# Altium PCB CrashDAQ For Hammond 1554H.PcbDoc (part 1 of 2)
Units mil, origin at the board's own origin, x right, y up, seen from the top; angles counter-clockwise.
Board outline 6580.35 x 4200 mil, 2 copper layers (Top Layer, Bottom Layer); 109 components, 89 nets, 487 pads, 126 vias.
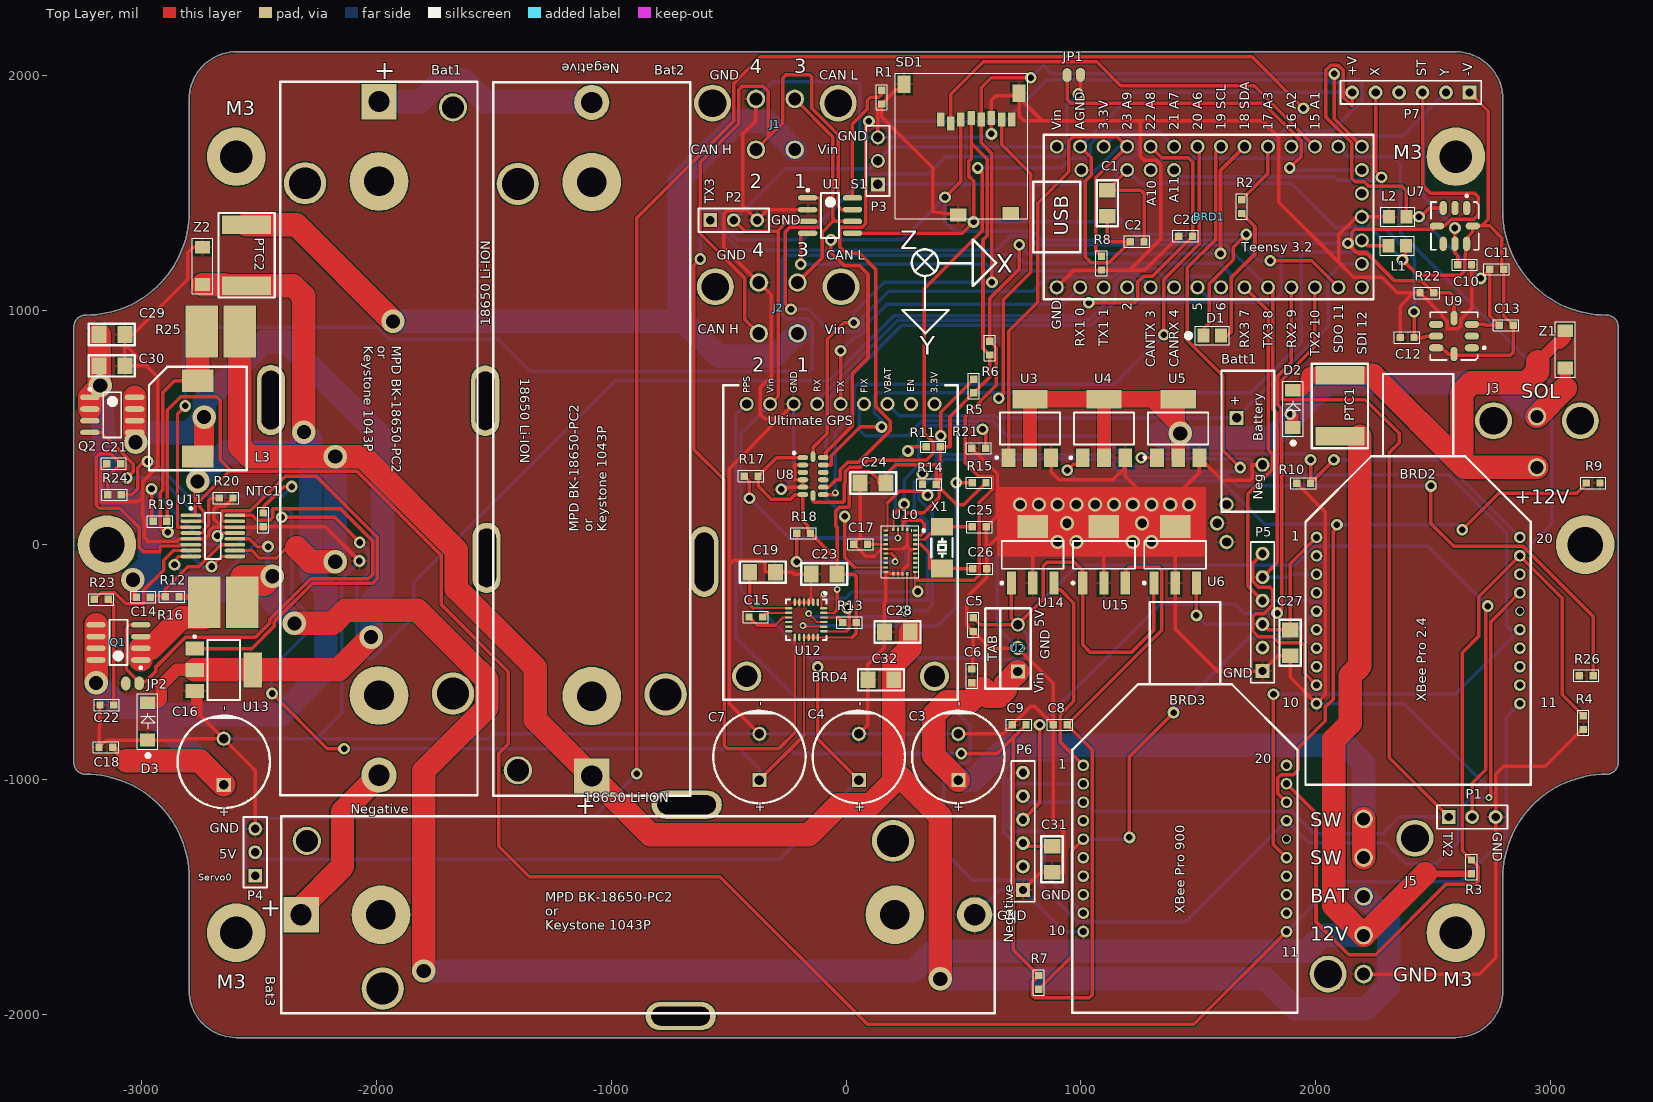
[diagram p0: Top Layer view]
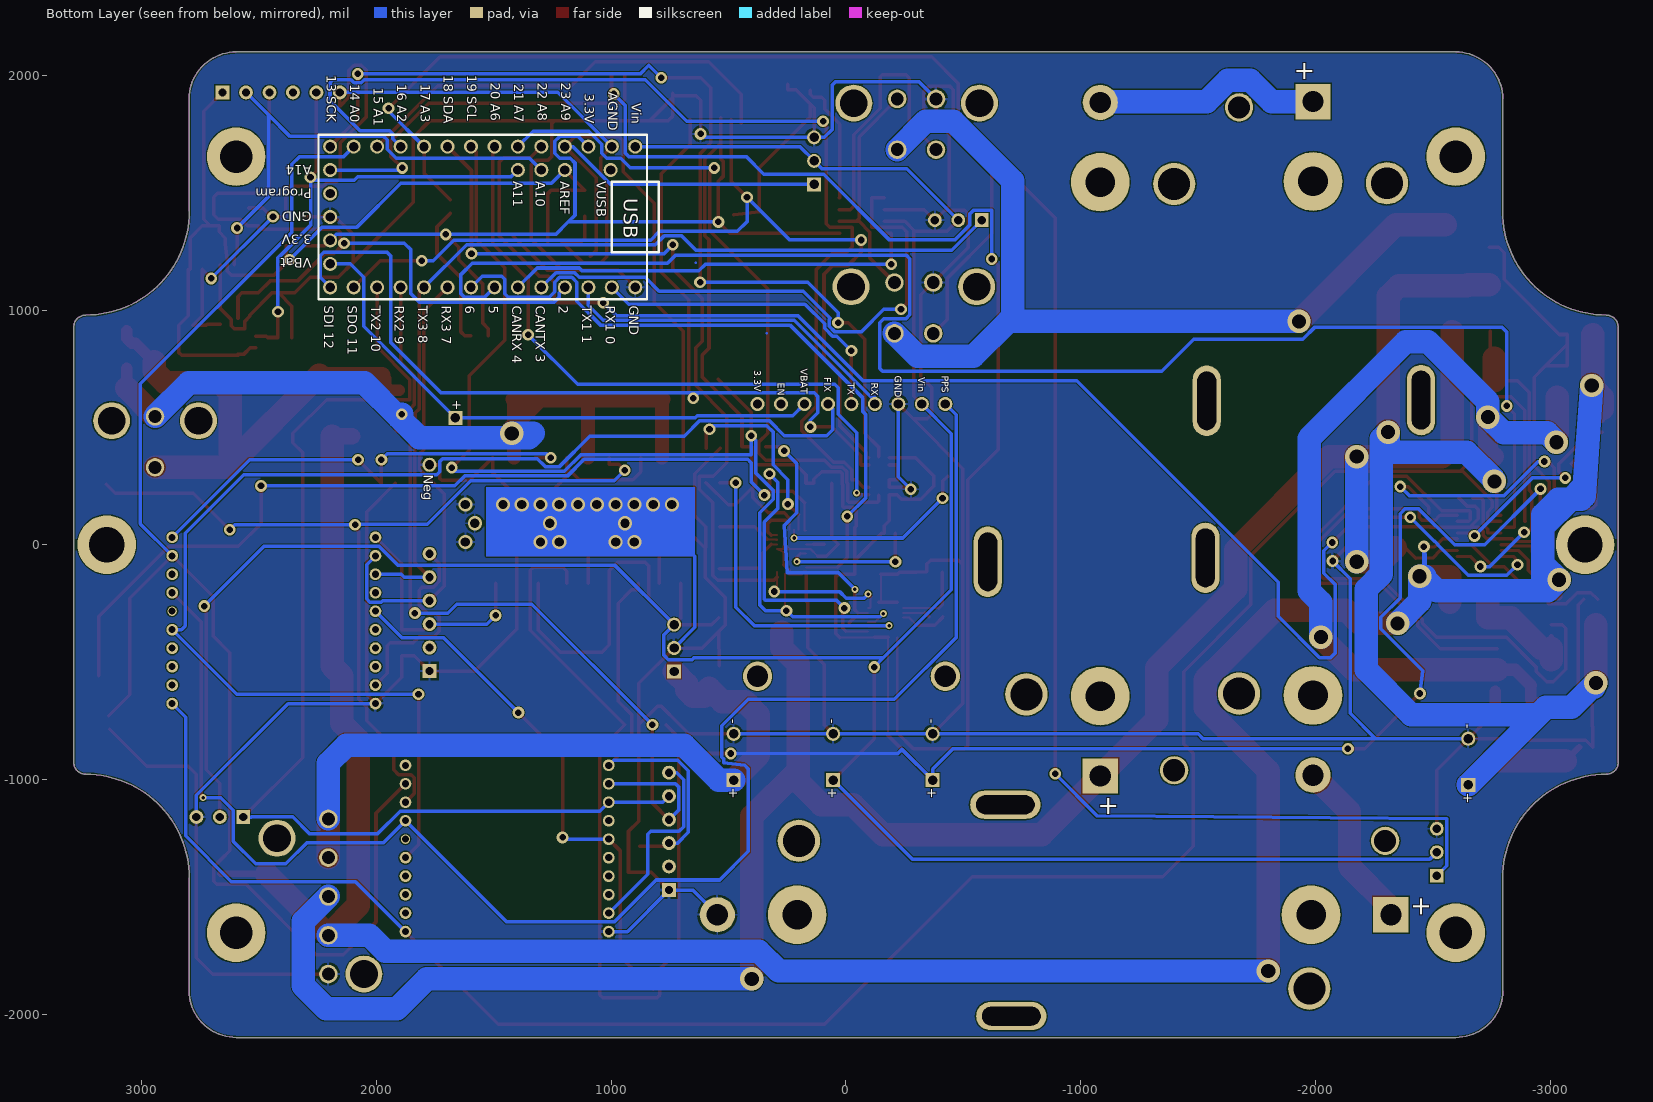
[diagram p1: Bottom Layer view, seen from below]

## Layer stack, top to bottom
Top Solder: solder mask 0.4, Solder Resist, Dk 3.5
Top Layer: signal copper 1.4
Dielectric 1: dielectric 12.6, FR-4, Dk 4.8
Bottom Layer: signal copper 1.4
Bottom Solder: solder mask 0.4, Solder Resist, Dk 3.5

## Board outline
-3240.35,-978.31 cw(c-3240.35,-928.31) -3290.35,-928.31 -3290,-928.31 -3290,928.31 cw(c-3240,928.31) -3240,978.31 ccw(c-3240,1420) -2798.31,1420 -2798.31,1900 -2798.43,1900 cw(c-2598.43,1900) -2598.43,2100 2598.43,2100 cw(c2598.43,1900) 2798.43,1900 2798.31,1900 2798.31,1420 ccw(c3240,1420) 3240,978.31 cw(c3240,928.31) 3290,928.31 3290,-928.31 cw(c3240,-928.31) 3240,-978.31 ccw(c3240,-1420) 2798.31,-1420 2798.31,-1900 2798.43,-1900 cw(c2598.43,-1900) 2598.43,-2100 -2598.78,-2100 cw(c-2598.78,-1900) -2798.78,-1900 -2798.66,-1900 -2798.66,-1420 ccw(c-3240.35,-1420)

## Design rules (kind name [scope] priority, off if disabled: settings)
Clearance [All] p1: gap=5
HoleSize [All] p1: absolutevalues=TRUE maxlimit=250 minlimit=1 maxpercent=80.000 minpercent=20.000
PolygonConnect [All] p1: connectstyle=Relief reliefconductorwidth=10 reliefentries=4 polygonreliefangle="90 Angle" airgapwidth=10
RoomDefinition TeensyCrashDAQ [InComponentClass('TeensyCrashDAQ')] p1: confinementstyle=ConfineIn formatcopy=TRUE lockcomponents=FALSE outline -4418.43,-3668.54 -2418.43,-3668.54 -2418.43,-2668.54 -4418.43,-2668.54
RoomDefinition CrashDAQSensors [InComponentClass('CrashDAQSensors')] p2: confinementstyle=ConfineIn formatcopy=TRUE lockcomponents=FALSE outline -4418.43,-3668.54 -2418.43,-3668.54 -2418.43,-2668.54 -4418.43,-2668.54
RoutingVias RoutingVias_1 [InNet('12V0')  OR InNet('12V0A')   or InNet('12V0B')      or InNet('12V0C') or InNet('12VSWITCHED')    or InNet('BAT') or InNet('BAT2')     or InNet('BAT3') or InNet('SOLENOID') or InNet('RAWIN') or InNet('RAW')] p1: holewidth=60 width=100 viastyle="Through Hole" minholewidth=30 minwidth=50 maxholewidth=120 maxwidth=150
RoutingVias [All] p2: holewidth=28 width=50 viastyle="Through Hole" minholewidth=28 minwidth=50 maxholewidth=28 maxwidth=50
SMDNeckDown [All] p1: percent=90.000
SilkToSilkClearance [All] p1: silktosilkclearance=1
SolderMaskExpansion [All] p1: expansion=4
Width 12V [InNet('12V0')  OR InNet('12V0A')   or InNet('12V0B')      or InNet('12V0C') or InNet('12VSWITCHED')    or InNet('BAT') or InNet('BAT2')     or InNet('BAT3') or InNet('SOLENOID') or InNet('RAWIN') or InNet('RAW')] p1: maxlimit=150 minlimit=10 preferedwidth=100
Width [All] p2: maxlimit=50 minlimit=7 preferedwidth=15
28 further rules are at their usual default settings.

## Classes and differential pairs
component class CrashDAQSensors: Bat1 Bat2 Bat3 BRD4 C10 C11 C12 C13 C14 C15 C16 C17 C18 C19 C20 C21 C22 C23 C24 C25 C26 C28 C29 C30 C32 D3 JP1 JP2 L3 NTC1 P7 PTC2 Q1 Q2 R11 R12 R13 R14 R15 R16 R17 R18 R19 R20 R21 R22 R23 R24 R25 R26 U7 U8 U9 U10 U11 U12 U13 X1 Z2
component class TeensyCrashDAQ: Batt1 BRD1 BRD2 BRD3 C1 C2 C3 C4 C5 C6 C7 C8 C9 C27 C31 D1 D2 J1 J2 J3 J5 L1 L2 P1 P2 P3 P4 P5 P6 PTC1 R1 R2 R3 R4 R5 R6 R7 R8 R9 R10 SD1 U1 U2 U3 U4 U5 U6 U14 U15 Z1

## Components (designator, comment, footprint, x,y, rotation, side; value= is the part's Value field where it differs from the comment)
Bat1 "18650" "18650 HOLDER" -1083.66,449.8 r90 top
Bat2 "18650" "18650 HOLDER" -1990.16,452.76 r270 top
Bat3 "18650" "18650 HOLDER" -886.81,-1576.77 r0 top
Batt1 "CR1225FV-LF" "Coin Cell with Tabs" 1774.61,340.55 r90 top
BRD1 "Teensy 3.2" Teensy 2197.83,1096.46 r90 top
BRD2 "Xbee 2.4 GHz" Xbee 2004.92,31.5 r0 top
BRD3 "Xbee 900 MHz" Xbee 1010.83,-939.96 r0 top
BRD4 "Adafruit Ultimate GPS" GPS 376.7,679.28 r90 top
C1 "4.7uF" 1206 1113.19,1454.72 r90 top
C2 "0.1uF" 0603 1240.16,1291.34 r0 top
C3 "330uF" "Elec. Cap 5 x 10mm" 478.35,-1002.95 r90 top
C4 "330uF" "Elec. Cap 5 x 10mm" 54.63,-1002.95 r90 top
C5 "0.1uF" 0603 542.32,-340.55 r90 top
C6 "0.1uF" 0603 536.42,-559.06 r270 top
C7 "330uF" "Elec. Cap 5 x 10mm" -369.09,-1002.95 r90 top
C8 "1.0uF" 0603 912.4,-767.72 r0 top
C9 "8.2pF" 0603 737.2,-767.72 r0 top
C10 "1000pF" 0603 2635.83,1192.91 r180 top
C11 "0.1uF" 0603 2772.64,1173.23 r0 top
C12 "1000pF" 0603 2390.75,882.87 r0 top
C13 "0.1uF" 0603 2812.99,935.04 r0 top
C14 "15nF" 0603 -2994.09,-223.43 r0 top
C15 "0.22uF" 0603 -383.86,-308.07 r0 top
C16 "330uF" "Elec. Cap 5 x 10mm" -2651.57,-1023.62 r90 top
C17 "1.0uF" 0603 62.01,1.97 r0 top
C18 "0.1uF" 0603 -3153.54,-863.19 r0 top
C19 "4.7uF" 1206 -355.31,-117.13 r0 top
C20 "4700pF" 0603 1446.85,1314.96 r0 top
C21 "0.47uF" 0603 -3120.08,345.47 r0 top
C22 "0.1uF" 0603 -3149.61,-683.07 r0 top
C23 "4.7uF" 1206 -93.5,-125 r0 top
C24 "4.7uF" 1206 115.16,262.8 r0 top
C25 "12 pF" 0603 567.91,75.79 r180 top
C26 "12 pF" 0603 569.88,-102.36 r180 top
C27 "10uF" 1206 1892.72,-418.31 r90 top
C28 "10uF" 1206 218.5,-372.05 r0 top
C29 "10uF" 1206 -3127.95,895.67 r180 top
C30 "10uF" 1206 -3127.95,761.81 r180 top
C31 "10uF" 1206 877.95,-1340.55 r90 top
C32 "10uF" 1206 148.62,-575.79 r0 top
D1 "Red" "0805 Polarized" 1559.06,890.75 r0 top
D2 "B360A-13-F" "SMA with A and K" 1903.54,499.02 r90 top
D3 "B360A-13-F" "SMA with A and K" -2976.38,-832.68 r90 top
J1 "39-29-9040" "4 POS Vertical MINI-FIT JR" -301.18,1899.61 r0 top
J2 "39-29-9040" "4 POS Vertical MINI-FIT JR" -289.37,1117.13 r0 top
J3 "39-29-9023" "2 POS Vertical MINI-FIT JR" 2861.22,546.26 r0 top
J5 "Molex 39-30-2050" "5 POS Vert MINI-FIT JR" 2205.71,-1829.72 r90 top
JP1 "Solder Jumper" "Solder Jumper" 980.32,2000 r0 top
JP2 "Solder Jumper" "Solder Jumper" -3050.2,-589.57 r180 top
L1 "80 Ohms" 0805 2350.39,1273.62 r180 top
L2 "80 Ohms" 0805 2348.43,1397.64 r0 top
L3 "8.2 uH" "Inductor - 1045" -2970.47,316.93 r0 top
NTC1 "10k" 0603 -2483.27,105.32 r90 top
P1 "Header 3" HDR1X3#1 2567.91,-1160.43 r0 top
P2 "Header 3" HDR1X3#1 -578.74,1382.87 r0 top
P3 "Header 3" HDR1X3#2 135.83,1535.43 r90 top
P4 "Header 3" HDR1X3#1 -2517.72,-1410.43 r90 top
P5 "Header 6" HDR1X6 1774.61,-538.39 r90 top
P6 "Header 6" HDR1X6 753.94,-1471.46 r90 top
P7 "Header 6" HDR1X6 2656.5,1927.17 r180 top
PTC1 "750mA" 2920 2104.33,591.54 r90 top
PTC2 "750mA" 2920 -2554.13,1233.27 r270 top
Q1 "IRF9328" SOIC-8 -3100.39,-416.34 r180 top
Q2 "IRF9328" SOIC-8 -3126.97,553.15 r0 top
R1 "4.7k" 0603 152.56,1907.48 r90 top
R2 "470" 0603 1686.02,1440.94 r90 top
R3 "180k" 0603 2665.35,-1373.03 r90 top
R4 "32.4k" 0603 3141.73,-757.87 r90 top
R5 "4.7k" 0603 544.29,676.18 r270 top
R6 "4.7k" 0603 612.2,837.6 r270 top
R7 "4.7k" 0603 820.87,-1865.16 r90 top
R8 "32.4k" 0603 1088.58,1199.8 r90 top
R9 "32.4k" 0603 3183.07,262.8 r180 top
R10 "32.4k" 0603 1949.8,261.81 r0 top
R11 "10k" 0603 372.05,417.32 r0 top
R12 "4.7k" 0603 -2872.05,-222.44 r0 top
R13 "10k" 0603 14.76,-331.69 r0 top
R14 "10k" 0603 355.32,256.89 r0 top
R15 "10k" 0603 566.93,263.78 r0 top
R16 "0.04" 2818 -2654.53,-246.06 r0 top
R17 "10k" 0603 -404.53,292.32 r0 top
R18 "10k" 0603 -181.1,48.23 r0 top
R19 "32.4k" 0603 -2923.23,99.41 r180 top
R20 "309k" 0603 -2641.73,198.82 r0 top
R21 "4.7k" 0603 565.94,410.43 r0 top
R22 "4.7k" 0603 2475.39,1072.83 r0 top
R23 "6.04k" 0603 -3173.23,-233.27 r0 top
R24 "32.4k" 0603 -3117.13,212.6 r0 top
R25 "0.025" 2818 -2664.37,908.46 r0 top
R26 "4.7k" 0603 3154.53,-558.07 r0 top
SD1 "microSD" "SD Card Holder" 219.49,1389.76 r0 top
U1 "MCP2562" SOIC-8 -67.91,1402.56 r0 top
U2 "OKI-78SR" 78xx 732.28,-540.35 r90 top
U3 "NCV8403ASTT1G" ONSC-SOT-223-4-318E-04_V 783.46,495.08 r90 top
U4 "NCV8403ASTT1G" ONSC-SOT-223-4-318E-04_V 1099.41,495.08 r90 top
U5 "NCV8403ASTT1G" ONSC-SOT-223-4-318E-04_V 1415.35,495.08 r90 top
U6 "MCP1825ST-3302E/DB" SOT-223-DB3_M 1402.56,-43.31 r90 top
U7 "ADXL001-250" ADI-E-8-1_V 2594.49,1358.27 r270 top
U8 "ADXL375" ADI-CC-14-1_V -140.75,292.32 r0 top
U9 "ADXL001-250" ADI-E-8-1_V 2590.55,888.78 r180 top
U10 "BNO055" "BNO055 LGA" 232.28,-29.53 r270 top
U11 "LTC4006EGN-2" LT-GN-16_N -2697.83,37.4 r0 top
U12 "LSM9DS0 IMU" "LGA 4x4x1 mm 24-lead" -169.29,-319.88 r0 top
U13 "NCV8403ASTT1G" ONSC-SOT-223-4-318E-04_V -2651.57,-533.46 r0 top
U14 "MCP1825ST-3302E/DB" SOT-223-DB3_M 795.28,-43.31 r90 top
U15 "MCP1825ST-3302E/DB" SOT-223-DB3_M 1098.92,-43.31 r90 top
X1 "32.768KHz" "XTAL 2 pad" 408.46,-101.38 r90 top
Z1 "SMA6J" SMA 3064.96,911.42 r270 top
Z2 "SMA6J" SMA -2742.13,1108.27 r90 top

## Footprints (in the part's own frame and the unit in brackets; to place one, negate y for a bottom-side part, rotate by r counter-clockwise, add the part's x,y. Pads: shape width x height; smd on the part's side, far side on the other; paste and mask are expansions set on the pad)
"2 POS Vertical MINI-FIT JR" [mm] "Vertical Header 39-29-9023"
  round 4 hole 3: 0(-2.6,-0.46) 0(6.8,-0.46)
  round 2 hole 1.4: 1(2.1,-5.5) 2(2.1,0)
"4 POS Vertical MINI-FIT JR" [mm] "Vertical Header"
  round 4 hole 3: 0(-6.8,-0.46) 0(6.8,-0.46)
  round 2 hole 1.4: 1(2.1,-5.5) 2(-2.1,-5.5) 3(2.1,0) 4(-2.1,0)
"5 POS Vert MINI-FIT JR" [mm] "Molex 5 Pos Vertical Header with Pegs 39-30-2050"
  round 4 hole 3: 0(0,3.85) 0(14.7,-5.55)
  round 2 hole 1.4: 1(16.8,0) 2(12.6,0) 3(8.4,0) 4(4.2,0) 5(0,0)
78xx [mil] "Voltage regulator based on LM7805"
  rect 60x60 hole 40: 1(0,0)
  round 60 hole 40: 2(100,0) 3(200,0)
  silkscreen extent -73,-55 269,139
0603 [mm] "0603 SMP Component with outline"
  rect 0.8x0.8 smd: 1(-0.75,0) 2(0.75,0)
  silkscreen extent -1.39,-0.61 1.36,0.61
0805 [mm]
  rect 1.3x1.5 smd: 1(-0.899,0) 2(1.001,0)
  silkscreen extent -1.8,-1.02 1.9,1.02
"0805 Polarized" [mm] "Polarized 0805 with Pin 1 as Anode (+)"
  rect 1.3x1.5 smd: 1(-0.899,0) 2(1.001,0)
  silkscreen extent -2.79,-0.99 1.88,0.99
1206 [mm]
  rect 1.6x1.8 smd: 1(-1.4,0) 2(1.4,0)
  silkscreen extent -2.47,-1.16 2.5,1.15
2818 [mil] "Power Metal Strip® Resistors, High Power (7 W)  Low Value (down to 0.001 O), Surface Mount"
  rect 138x220 smd: 1(-81,0) 2(81,0)
2920 [mm] "Littlefuse PolyFues SMT 2920L Series"
  rect 2x5.3 smd: 1(-3.3,0) 2(3.3,0)
  silkscreen extent -4.57,-3.05 4.57,3.05
"18650 HOLDER" [mil] "MPD BK-18650-PC2 Single LI-ION Cell Holder"
  round 120 hole 94 unplated: 0(-1411,315)
  round 250 hole 126: 0(-1095,0) 0(1095,0)
  round 180 hole 136: 0(-1087.5,-315) 0(1087.5,315)
  rect 150x150 hole 90: 1(-1435,0)
  round 150 hole 90: 2(1435,0)
  silkscreen extent -1520,-420 1520,420
ADI-CC-14-1_V [mm] "QFN, 14-Leads, Body 5x3mm, Pitch 0.8mm"
  oval 1.145x0.55 smd: 1(-1.098,2) 2(-1.098,1.2) 3(-1.098,0.4) 4(-1.098,-0.4) 5(-1.098,-1.2) 6(-1.098,-2) 8(1.098,-2) 9(1.098,-1.2) 10(1.098,-0.4) 11(1.098,0.4) 12(1.098,1.2) 13(1.098,2)
  oval 0.55x1.145 smd: 7(0,-2.097) 14(0,2.097)
  silkscreen extent -2.18,2.38 -1.93,2.62, body extent -1.5,-2.5 1.5,2.5, height 1
ADI-E-8-1_V [mm] "LCC, 8-Leads, Body 5x5mm, Pitch 1.27mm"
  oval 1.56x0.78 smd: 1(-1.94,1.27) 2(-1.94,0) 3(-1.94,-1.27) 5(1.94,-1.27) 6(1.94,0) 7(1.94,1.27)
  oval 0.78x1.56 smd: 4(0,-1.94) 8(0,1.94)
  silkscreen extent -3.39,-2.58 2.58,2.58, body extent -2.5,-2.5 2.5,2.5, height 2.21
"BNO055 LGA" [mm] "BOSCH BNO055  Intelligent 9-axis absolute orientation sensor"
  rect 0.25x0.475 smd: 1(-2.286,1.594) 6(-2.286,-1.594) 7(-1.786,-1.594) 8(-1.286,-1.594) 9(-0.786,-1.594) 10(-0.286,-1.594) 11(0.214,-1.594) 12(0.714,-1.594) 13(1.214,-1.594) 14(1.714,-1.594) 15(2.214,-1.594) 20(2.214,1.58) 21(1.714,1.58) 22(1.214,1.58) 23(0.714,1.58) 24(0.214,1.58) 25(-0.286,1.58) 26(-0.786,1.58) 27(-1.286,1.58) 28(-1.786,1.58)
  rect 0.375x0.25 smd paste+0: 2(-2.413,0.719)
  rect 0.375x0.25 smd: 3(-2.413,0.219) 4(-2.413,-0.281) 5(-2.413,-0.781) 16(2.413,-0.781) 17(2.413,-0.281) 18(2.413,0.219) 19(2.413,0.719)
  silkscreen extent -2.82,-2.08 2.85,2.62
"Coin Cell with Tabs" [mil] "Renata Two pins vertical mounting"
  rect 60x60 hole 40: 1(200,110.23)
  round 60 hole 40: 2(0,0)
  silkscreen extent -200,-50 400,175
"Elec. Cap 5 x 10mm" [mil] "2 lead polarized Radial Capacitor with 5 mm lead spacing and 10 mm diameter can"
  rect 60x60 hole 40: 1(0,0)
  round 60 hole 40: 2(196.85,0)
  silkscreen extent -98,-197 295,197
GPS [mil] "Adafruit Ultimate GPS Breakout"
  round 125 hole 90: 0(-1240,0) 0(-1240,800)
  round 60 hole 40: 1(-80,0) 2(-80,100) 3(-80,200) 4(-80,300) 5(-80,400) 6(-80,500) 7(-80,600) 8(-80,700) 9(-80,800)
  silkscreen extent -1340,-100 0,900
HDR1X3#1 [mm] "Connector; Header; 3 Position"
  rect 1.5x1.5 hole 0.9: 1(0,0)
  round 1.5 hole 0.9: 2(2.54,0) 3(5.08,0)
  silkscreen extent -1.27,-1.27 6.35,1.27
HDR1X3#2 [mm] "Connector; Header; 3 Position"
  rect 1.5x1.5 hole 1.016: 1(0,0)
  round 1.5 hole 1.016: 2(2.54,0) 3(5.08,0)
  silkscreen extent -1.27,-1.27 6.35,1.27
HDR1X6 [mm] "Connector; Header; 6 Position"
  rect 1.5x1.5 hole 0.9: 1(0,0)
  round 1.5 hole 0.9: 2(2.54,0) 3(5.08,0) 4(7.62,0) 5(10.16,0) 6(12.7,0)
  silkscreen extent -1.27,-1.27 13.97,1.27
"Inductor - 1045" [mm] "Wurth WE-PDF SMD Shielded Power Inductor P/N: 7447797820"
  rect 3.4x2.4 smd: 1(5.3,1.5) 2(5.3,9.7)
  silkscreen extent 0,0 10.6,11.2
"LGA 4x4x1 mm 24-lead" [mm] "QFN, 24-Leads, Body 4.1x4.1mm, Pitch 0.5mm,  IPC High Density"
  oval 0.25x0.8 smd: 1(1.25,1.9) 2(0.75,1.9) 3(0.25,1.9) 4(-0.25,1.9) 5(-0.75,1.9) 6(-1.25,1.9) 13(-1.25,-1.9) 14(-0.75,-1.9) 15(-0.25,-1.9) 16(0.25,-1.9) 17(0.75,-1.9) 18(1.25,-1.9)
  oval 0.8x0.25 smd: 7(-1.9,1.25) 8(-1.9,0.75) 9(-1.9,0.25) 10(-1.9,-0.25) 11(-1.9,-0.75) 12(-1.9,-1.25) 19(1.9,-1.25) 20(1.9,-0.75) 21(1.9,-0.25) 22(1.9,0.25) 23(1.9,0.75) 24(1.9,1.25)
  silkscreen extent -2.2,-2.2 2.2,2.97, body extent -2.05,-2.05 2.05,2.05, height 0.8
LT-GN-16_N [mm] "SOP, 16-Leads, Body 5x4mm, Pitch 0.635mm, IPC Medium Density"
  oval 2.25x0.4 smd: 1(-2.375,2.222) 2(-2.375,1.587) 3(-2.375,0.952) 4(-2.375,0.317) 5(-2.375,-0.318) 6(-2.375,-0.953) 7(-2.375,-1.588) 8(-2.375,-2.223) 9(2.375,-2.223) 10(2.375,-1.588) 11(2.375,-0.953) 12(2.375,-0.318) 13(2.375,0.317) 14(2.375,0.952) 15(2.375,1.587) 16(2.375,2.222)
  silkscreen extent -2.5,-2.5 0.85,3.1, body extent -2,-2.5 2,2.5, height 1.75
ONSC-SOT-223-4-318E-04_V [mm] "SOT223, 4-Leads, Body 6.5x3.5mm, Pitch 2.3mm"
  rect 2x1.5 smd: 1(-3.15,2.3) 2(-3.15,0) 3(-3.15,-2.3)
  rect 2x3.8 smd: 4(3.15,0)
  silkscreen extent -3.27,-3.25 1.75,3.72, body extent -1.75,-3.25 1.75,3.25, height 1.75
"SD Card Holder" [mm] "Amphenol 101-00660-68-6 CONN MICRO SD CARD PUSH-PUSH R/A"
  rect 0.8x1.5 smd: 1(4.66,10.7) 2(5.76,10.3) 3(6.86,10.7) 4(7.96,10.9) 5(9.06,10.7) 6(10.16,10.9) 7(11.26,10.7) 8(12.36,10.7)
  rect 1.4x1.9 smd: 6(0.7,14.55) 6(13.15,13.55)
  rect 1.8x1.4 smd: 6(6.55,0.4) 9(12.25,0.527)
  silkscreen extent -0.25,0 14.1,15.75
SMA [mil] "SMA with outline"
  rect 55x65 smd: 1(0,0) 2(159,0)
  silkscreen extent -38,-44 197,43
"SMA with A and K" [mil] "SMA with outline and Cathode Bar on Pin 2"
  rect 55x65 smd: 1(0,0) 2(159,0)
  silkscreen extent -71,-44 197,43
SOIC-8 [mm]
  oval 2.1x0.6 smd: 1(-2.425,1.905) 2(-2.425,0.635) 3(-2.425,-0.635) 4(-2.425,-1.905) 5(2.425,-1.905) 6(2.425,-0.635) 7(2.425,0.635) 8(2.425,1.905)
  silkscreen extent -2.55,-2.45 0.97,2.88
"Solder Jumper" [mm]
  rrect100% 1x1.5 smd: 1(-0.974,0.025) 2(0.475,0.05)
SOT-223-DB3_M [mm] "SOT223, 4-Leads, Body 6.5x3.5mm, Pitch 2.3mm, Lead Span 7mm, IPC Low Density"
  rect 2.5x1 smd: 1(-3.05,2.3) 2(-3.05,0) 3(-3.05,-2.3)
  rect 2.5x3.3 smd: 4(3.05,0)
  silkscreen extent -3.17,-3.35 1.5,3.47, body extent -1.85,-3.35 1.85,3.35, height 1.8
Teensy [mil] "32 bit Arduino Compatible Microcontroller www.pjrc.com/teensy"
  round 60 hole 40: 1(0,0) 2(0,100) 3(0,200) 4(0,300) 5(0,400) 6(0,500) 7(0,600) 8(0,700) 9(0,800) 10(0,900) 11(0,1000) 12(0,1100) 13(0,1200) 14(0,1300) 15(100,0) 16(200,0) 17(300,0) 18(400,0) 19(500,0) 20(600,0) 21(600,100) 22(600,200) 23(600,300) 24(600,400) 25(600,500) 26(600,600) 27(600,700) 28(600,800) 29(600,900) 30(600,1000) 31(600,1100) 32(600,1200) 33(600,1300) 34(500,1195) 35(500,1000) 36(500,900) 37(500,800)
  silkscreen extent -50,-50 650,1400
Xbee [mil] "Digi XB radio Board"
  round 50 hole 30: 1(0,0) 2(0,-78.74) 3(0,-157.48) 4(0,-236.22) 5(0,-314.96) 6(0,-393.7) 7(0,-472.44) 8(0,-551.18) 9(0,-629.92) 10(0,-708.66) 11(866.14,-708.66) 12(866.14,-629.92) 13(866.14,-551.18) 14(866.14,-472.44) 15(866.14,-393.7) 17(866.14,-236.22) 18(866.14,-157.48) 19(866.14,-78.74) 20(866.14,0)
  round 40 hole 30: 16(866.14,-314.96)
  silkscreen extent -47,-1054 913,696
"XTAL 2 pad" [mm] "Digikey XC1659CT-ND"
  rect 1.9x2.4 smd: 1(0,0) 2(4.5,0)
  silkscreen extent 1.19,-1.14 3.28,1.14

## Part data
Bat1 Bat2 Bat3: library part Battery, "HOLDER FOR 18650 BATTERY"
Batt1: library part "CR2032 Battery Holder", "Coin Cell Battery 3V 2-PIN VERT 48mAh 12.5 x 2.5mm"
BRD1: library part Teensy, "32 Bit Arduino-Compatible Microcontroller"
BRD2: library part Xbee, "XBP24CZ7PIT-004"
BRD3: library part Xbee, "XBP9B-XCST-002"
BRD4: library part "GPS - Adafruit"
C1 C19 C23 C24: library part Cap, "4.7µF ±10% 50V X7R Ceramic Capacitor -55°C ~ 125°C Surface Mount, MLCC 1206"
C2 C5 C6 C11 C13 C18 C22: library part Cap, "0.10µF ±10% 50V X7R Ceramic Capacitor -55°C ~ 125°C Surface Mount, MLCC 0603 (1608 Metric) 0.063\" L x 0.031\" W (1.60mm x 0.80mm)"
C3 C4 C7 C16: library part "SMD Elec", "CAP ALUM 330UF 20% 50V RADIAL"
C8 C17: library part Cap, "1µF ±10% 10V X5R Ceramic Capacitor -55°C ~ 85°C Surface Mount, MLCC 0603 (1608 Metric) 0.063\" L x 0.031\" W (1.60mm x 0.80mm)"
C9: library part Cap, "8.2pF ±0.5pF 50V C0G, NP0 Ceramic Capacitor -55°C ~ 125°C Surface Mount, MLCC 0201 (0603 Metric) 0.024\" L x 0.012\" W (0.60mm x 0.30mm)"
C10 C12: library part Cap, "1000pF ±10% 50V X7R Ceramic Capacitor -55°C ~ 125°C Surface Mount, MLCC 0603 (1608 Metric) 0.063\" L x 0.031\" W (1.60mm x 0.80mm)"
C14: library part Cap, "CAP CER 0.015UF 50V X7R 0603"
C15: library part Cap, "0.22µF ±10% 25V X7R Ceramic Capacitor -55°C ~ 125°C Surface Mount, MLCC 0603 (1608 Metric) 0.063\" L x 0.031\" W (1.60mm x 0.80mm)"
C20: library part Cap, "Multilayer Ceramic Capacitors MLCC - SMD/SMT 0603 4700pF 50volts X7R 10%"
C21: library part Cap, "0.47µF ±10% 25V X7R Ceramic Capacitor -55°C ~ 125°C Surface Mount, MLCC 0603 (1608 Metric) 0.063\" L x 0.031\" W (1.60mm x 0.80mm)"
C25 C26: library part Cap, "CAP CER 12PF 50V NP0 0603"
C27 C28 C29 C30 C31 C32: library part Cap, "10µF -20%, +80% 16V Y5V (F) Ceramic Capacitor -30°C ~ 85°C Surface Mount, MLCC 120"
D1: library part "LED - SMD", "LED RED DIFFUSED 0805 SMD"
D2 D3: library part "Schottky Diode", "DIODE SCHOTTKY 60V 3A SMA"
J1 J2: library part "4 Pos Header Vert", "CONN HEADER 4POS 4.2MM VERT TIN"
J3: library part "2 Pos Header Vert", "2 Positions Header, Shrouded Connector Through Hole Tin"
J5: library part "5 Pos Header Vert", "Molex Mint Fit Jr 5 CKT VERT HEADER"
JP1 JP2: "DNP"
L1 L2: library part "Ferrite Bead", "Ferrite Bead 80ohms 100MHz 5A Monolithic 0805 SMD"
L3: library part Inductor, "FIXED IND 8.2UH 5.05A 28.6 MOHM"
NTC1: library part NTC, "THERMISTOR 10K OHM NTC 0603 SMD"
P1 P2 P3 P4: "Header, 3-Pin"
P5 P6 P7: "Header, 6-Pin"
PTC1 PTC2: library part PTC, "PTC RESETBL 60V 750MA SMD 2920"
Q1 Q2: library part "IRF9328 P-FET", "MOSFET P-CH 30V 12A 8-SOIC"
R1 R5 R6 R7 R12 R21 R22 R26: library part "Chip Resistor", "4.7k Ohm ±1% 0.1W, 1/10W Surface Mount Resistor Thick Film ±100ppm/°C 0603"
R2: library part "Chip Resistor", "RES SMD 470 OHM 1% 1/10W 0603"
R3: library part "Chip Resistor", "RES SMD 180K OHM 1% 1/10W 0603"
R4 R8 R9 R10 R19 R24: library part "Chip Resistor", "32.4k Ohm ±1% 0.1W, 1/10W Surface Mount Resistor Thick Film ±100ppm/°C 0603"
R11 R13 R14 R15 R17 R18: library part "Chip Resistor", "10k Ohm ±1% 0.1W, 1/10W Surface Mount Resistor Thick Film ±100ppm/°C 0603"
R16: library part "Chip Resistor", "0.04 Ohm ±1% 7W Surface Mount Resistor Metal Element ±75ppm/°C 2818"
R20: library part "Chip Resistor", "RES SMD 309K OHM 1% 1/10W 0603"
R23: library part "Chip Resistor", "6.04k Ohm ±1% 0.1W, 1/10W Surface Mount Resistor Thick Film ±100ppm/°C 0603"
R25: library part "Chip Resistor", "0.025 Ohm ±1% 7W Surface Mount Resistor Metal Element ±75ppm/°C 2818"
SD1: library part "SD Card Holder", "CONN MICRO SD CARD PUSH-PUSH R/A"
U1: library part MCP2551-I/P, "High-Speed CAN Transceiver, 8-Pin PDIP, Industrial Temperature"
U2: library part 7805, "5V DC/DC Converter (7805 replacement)"
U3 U4 U5 U13: "Self-Protected Low Side Driver with Temperature and Current Limit, 4-Pin SOT-223, Pb-Free, Tape and Reel"
U6 U14 U15: "500 mA, Low Voltage, Low Quiescent Current LDO Regulator, 3-Pin SOT-223, Extended Temperature, Tape and Reel"
U7 U9: library part AD22279-A, "IC ACCELEROMETER 250G 8CLCC"
U8: library part ADXL343BCCZ, "+/- 200G IC ACCEL SPI/I2C 3AX 14LGA"
U10: "IMUs - Inertial Measurement Units Absolute Orientation 9-Axis Sensor"
U11: "4 A, High Efficiency, Standalone Li-Ion Battery Charger, 6 to 28 V Vin, 16-pin SOP (GN-16), -40 to 85 degC"
U12: "MOD ACCELEROMETER 3D 24LGA"
X1: library part "Crystal Oscillator", "Crystal 32.7680kHz 20ppm 12.5pF 70 kOhm -40°C - 85°C Surface Mount 2-SMD"
Z1 Z2: library part "Zener - Bidirectional", "TVS DIODE 24VWM 38.9VC SMA"

## Free pads (board coordinates)
  round 250 hole 150: 0(-3149.61,0) 0(3149.61,0)
  round 250 hole 137.8: 0(-2598.43,-1653.54) 0(-2598.43,1653.54) 0(2598.42,-1653.54) 0(2598.42,1653.54)
  oval 120x300 hole 80 slot 250 at 90 deg unplated: 0(-2450.79,616.14) 0(-1537.4,613.19) 0(-1531.5,-56.1) 0(-604.33,-72.84)
  oval 300x120 hole 80 slot 250 at 0 deg unplated: 0(-704.73,-2008.86) 0(-679.13,-1108.27)
  round 0 all layers, no hole paste+0 mask+0: 1(410.43,1156.5) 1(525.59,1261.81)

## Via types
v1: diameter 50, hole 28, Top Layer to Bottom Layer, 80 vias
v2: diameter 60, hole 40, Top Layer to Bottom Layer, 19 vias
v3: diameter 100, hole 60, Top Layer to Bottom Layer, 19 vias
v4: diameter 30, hole 15, Top Layer to Bottom Layer, 8 vias

## Nets (pads, with @x,y where several pads share a name; then routed paths per layer and width w, separated by ;. In a path a pad name is that pad's centre, name@x,y a point inside that pad or via, vN(x,y) a via of type N, cw(c..) or ccw(c..) an arc to the next point about the centre after c; other vN are vias at no path point)
3V3: BRD1.16 BRD1.31 C7.1 C8.2 C9.2 C23.2 C24.2 D1.1 L1.2 R5.2 R6.2 R7.2 R11.2 R13.2 R14.2 R15.2 R17.2 R18.2 R19.2 SD1.4 U1.5 U8.1 U8.6 U10.3 U10.28 U12.15 U12.16 U12.17 U12.18 U15.3 | length 18305
  Top Layer w8.86: -179.13,-812.99 U12.15@-179.13,-394.69 ; U12.18@-120.08,-394.69 -120.08,-395.54 26.12,-395.54 ; U10.3@240.89,65.47 240.89,87.78 240.89,112.94 ; U10.28@294.48,40.79 319.07,40.79
  Top Layer w15: v1(-2959.43,237.46) -2959.43,106.08 R19.2@-2952.76,99.41 ; v1(-2445.63,-634.2) -2210.73,-869.09 v1(-2138.78,-869.09) ; C7.1@-369.1,-1002.95 -179.13,-812.99 ; U8.6@-183.96,213.58 U8.6@-184.43,213.58 ; U8.1@-183.96,371.06 -296.26,371.06 R17.2@-375,292.32 -375,250.64 -318.43,194.06 -236.44,194.06 -216.93,213.58 U8.6@-184.43,213.58 ; U12.15@-179.13,-394.69 U12.16@-159.45,-394.69 U12.17@-139.76,-394.69 U12.18@-120.08,-394.69 ; 26.12,-395.54 44.29,-377.38 R13.2@44.29,-331.69 44.29,-137.72 31.57,-125 C23.2@-38.39,-125 -38.39,-64.96 ; U1.5@27.56,1327.56 495.68,1327.56 v1(543.57,1375.46) 543.57,1548.71 523.65,1568.63 523.65,1634.41 532.87,1643.63 532.87,1709.83 ; 240.89,87.78 256.57,103.46 319.07,103.46 332.57,89.96 332.57,54.29 319.07,40.79 ; 240.89,112.94 263.41,135.46 331.83,135.46 397.57,201.2 R14.2@397.57,244.16 ; v1(491.17,-889.81) 644.64,-889.81 711.57,-822.88 ; SD1.4@532.87,1818.9 532.87,1709.83 ; R15.2@596.46,263.78 502.13,169.46 472.28,169.46 R14.2@397.57,244.16 ; C9.2@766.73,-767.72 711.57,-822.88 ; U15.3@1189.47,-163.39 1189.47,-112.65 1206.57,-95.54 1331.57,-95.54 1344.57,-108.54 1344.57,-365.07 C8.2@941.93,-767.72 1048.57,-874.36 1048.57,-1918.54 1036.07,-1931.04 805.07,-1931.04 792.57,-1918.54 792.57,-1863.92 R7.2@820.86,-1835.63 711.57,-1726.34 711.57,-822.88 ; D1.1@1523.65,890.75 1523.65,920.54 1548.57,945.46 1548.57,1112.26 1650.07,1213.76 1650.07,1266.96 v1(1705.07,1321.96) ; BRD1.16@2197.83,1296.46 2220.67,1273.62 L1.2@2310.99,1273.62 ; U8.6@-184.43,213.58 -184.43,101.46 -163.43,80.46 -163.43,48.23 R18.2@-151.58,48.23 -38.39,-64.96 ; -38.39,-64.96 -38.39,73.39 -42.93,77.93 -42.93,143.96 -26.34,160.55 11.57,160.55 12.73,161.7 12.73,253.52 16.04,256.84 16.04,303.41 23.37,310.73 69.94,310.73 70.33,311.12 103.91,311.12 136.57,278.46 136.57,263.79 137.57,262.79 C24.2@170.27,262.79 170.27,298.46 211.96,340.14 381.39,340.14 384.84,336.69 R14.2@384.84,256.89 ; R14.2@384.84,256.89 R14.2@397.57,244.16 ; R14.2@384.84,256.89 401.57,273.62 R11.2@401.57,417.32 441.8,417.32 442.94,418.46 442.94,545.3 R5.2@544.29,646.65 612.2,714.56 R6.2@612.2,808.07 583.57,836.7 583.57,1299.58 601.07,1317.08 601.07,1641.63 532.87,1709.83
  Bottom Layer w15: v1(-2959.43,237.46) -2721.43,-0.54 -2593.43,-0.54 -2438.93,153.96 -2383.82,153.96 -2361.32,131.46 -2361.32,-227.04 -2279.43,-308.94 -2279.43,-358.55 -2458.43,-537.54 v1(-2445.63,-634.2) ; v1(-2138.78,-869.09) -456.04,-869.09 -369.1,-956.04 C7.1@-369.1,-1002.95 -238.69,-872.54 -221.42,-889.81 v1(491.17,-889.81) ; v1(543.57,1375.46) 1183.07,1375.46 ; BRD1.31@1097.83,1696.46 1140.83,1739.46 1220.07,1739.46 1240.57,1718.96 1240.57,1667.96 1219.07,1646.46 1174.57,1646.46 1154.57,1626.46 1154.57,1403.96 1183.07,1375.46 ; BRD1.16@2197.83,1296.46 2172.33,1321.96 v1(1705.07,1321.96) 1236.57,1321.96 1183.07,1375.46
5V0: BRD1.33 BRD4.8 C4.1 C5.2 P1.2 P2.2 P3.2 P4.2 U1.3 U2.3 U6.1 U14.1 U15.1 | length 13212.3
  Top Layer w15: P2.2@-478.74,1382.87 -432.32,1336.46 -292.53,1336.46 -289.43,1339.56 ; BRD4.8@-323.3,599.28 -289.43,633.15 -289.43,1339.56 ; U1.3@-163.39,1377.56 -251.43,1377.56 -289.43,1339.56 ; v1(-120.43,-521.54) -120.43,-827.9 C4.1@54.63,-1002.95 ; C5.2@542.32,-311.03 571.65,-340.35 U2.3@732.28,-340.35 ; U14.1@704.72,-163.39 704.72,-312.79 U2.3@732.28,-340.35 ; U6.1@1312.01,-163.39 1312.01,-362.2 1216.54,-457.68 1039.37,-457.68 1008.37,-426.67 U15.1@1008.37,-163.39 1008.37,-109.84 973.33,-74.8 856.3,-74.8 840.57,-90.53 840.57,-232.06 U2.3@732.28,-340.35 ; P1.2@2667.91,-1160.43 2667.91,-1017.21 2725.39,-959.72 2725.39,-270.72 v1(2734.57,-261.54)
  Bottom Layer w15: P4.2@-2517.72,-1310.43 -2488.58,-1339.57 -281.99,-1339.57 C4.1@54.63,-1002.95 ; P2.2@-478.74,1382.87 -259.66,1601.95 102.35,1601.95 P3.2@135.83,1635.43 196.85,1696.46 BRD1.33@897.83,1696.46 ; BRD4.8@-323.3,599.28 -449.43,473.15 -449.43,-192.54 -159.43,-482.54 ; v1(-120.43,-521.54) -159.43,-482.54 ; v1(2734.57,-261.54) 2480.57,-7.54 1988.57,-7.54 1907.57,-88.54 984.09,-88.54 U2.3@732.28,-340.35 775.57,-383.64 775.57,-471.54 756.57,-490.54 655.57,-490.54 647.57,-482.54 -159.43,-482.54
12V0: C14.1 C29.2 C30.2 J5.4 PTC1.1 Q2.1 Q2.2 Q2.3 R3.1 R16.2 U11.12 | length 13392.8
  Top Layer w14.17: U11.12@-2604.33,24.9 -2542.87,24.9 -2508.13,-9.84 v1@-2462.6,-9.84
  Top Layer w21.26: Q2.3@-3222.44,528.15 -3223.43,528.15 -3223.43,578.15 Q2.2@-3222.44,578.15 ; v3(-3177.91,678.38) v3@-3177.13,673.46
  Top Layer w28.35: v3(-3038.43,-149.54) v3(-3038.43,-149.86) C14.1@-3038.43,-208.62 ; 2467.52,-1402.56 R3.1@2665.35,-1402.56 ; C14.1@-3038.43,-208.62 -3038.43,-223.42 C14.1@-3023.62,-223.42 C14.1@-3038.43,-208.62
  Top Layer w56.69: v3(-3177.91,678.38) v3(-3177.41,678.38)
  Top Layer w70.87: PTC1.1@2104.33,461.61 PTC1.1@2189.96,461.61
  Top Layer w100: Q2.2@-3222.44,578.15 Q2.1@-3222.44,628.15 -3182.07,673.46 C30.2@-3183.07,761.81 C29.2@-3183.07,895.67 ; R16.2@-2573.53,-246.06 R16.2@-2573.53,-169.54 ; v3(-2444.43,-135.54) v3@-2445.43,-135.54 ; v3(-2444.43,-134.54) v3@-2445.43,-135.54 ; v3(-2350.43,-335.54) -2188.43,-335.54 -2132.43,-279.54 -1826.13,-279.54 -1592.64,-513.03 ; v3(-1799.43,-1816.54) -1799.43,-963.8 -1605.31,-769.68 ; -1615.1,-779.74 -1530.16,-694.8 -1530.16,-574.68 -1615.1,-489.74 ; PTC1.1@2189.96,461.61 2189.96,-516.5 2148.57,-557.88 2148.57,-761.4 2078.74,-831.23 2078.74,-1537.4 J5.4@2205.71,-1664.37 2467.52,-1402.56 ; R16.2@-2573.53,-169.54 -2573.53,-136.04 -2573.03,-135.54 v3@-2445.43,-135.54 ; R16.2@-2573.53,-169.54 -2479.43,-169.54 v3@-2445.43,-135.54
  Bottom Layer w20: v3@-2465.55,-134.54 -2465.55,-41.34 -2464.57,-42.32 v1@-2464.57,-11.81
  Bottom Layer w100: v3(-3177.91,678.38) -3145.43,206.46 -3132.93,193.96 -3089,193.96 ; v3(-3177.41,678.38) -3144.93,249.88 -3089,193.96 ; v3(-3038.43,-149.86) v3@-3038.27,-149.7 ; v3(-3038.43,-149.54) v3@-3038.27,-149.7 ; v3@-2465.55,-134.54 -2456.43,-134.54 -2518.43,-196.54 ; v3(-2444.43,-135.54) -2444.43,-241.54 v3(-2350.43,-335.54) ; v3(-2444.43,-134.54) -2455.43,-134.54 -2517.43,-196.54 -2518.43,-196.54 ; v3(-1799.43,-1816.54) 286.93,-1816.54 371.19,-1732.28 1962.44,-1732.28 2030.35,-1664.37 J5.4@2205.71,-1664.37 ; -3089,193.96 -2969.61,74.56 -2969.61,-81.04 v3@-3038.27,-149.7 ; -3089,193.96 -3035.93,193.96 -2969.43,127.46 -2969.43,-183.04 -2955.93,-196.54 ; v3@-3038.27,-149.7 -2991.43,-196.54 -2955.93,-196.54 ; -2955.93,-196.54 -2518.43,-196.54
  other v1: -2462.6,-7.87
12V0A: Q1.1 Q1.2 Q1.3 R12.2 R16.1 | length 620.7
  Top Layer w21.26: Q1.3@-3004.92,-391.34 -3005.43,-391.34 -3005.43,-441.34 Q1.2@-3004.92,-441.34 -2962.01,-441.34
  Top Layer w28.35: R12.2@-2842.52,-222.44 R16.1@-2735.53,-222.44
  Top Layer w100: Q1.1@-3004.92,-491.34 Q1.2@-3004.92,-441.34 ; -2962.01,-441.34 -2832.98,-312.31 -2735.53,-312.31 R16.1@-2735.53,-246.06 R16.1@-2735.53,-222.44
12V0B: D3.2 L3.1 Q2.5 Q2.6 Q2.7 Q2.8 U13.2 U13.4 | length 3802.1
  Top Layer w21.26: Q2.5@-3031.5,478.15 -3027.43,478.15 v3(-3027.43,436.46)
  Top Layer w49.5: D3.2@-2976.38,-673.68 -2930.93,-673.68 -2918.43,-661.18 -2918.43,-599.32
  Top Layer w53.15: -2918.43,-599.32 -2852.57,-533.46 U13.2@-2775.59,-533.46
  Top Layer w85.04: L3.1@-2761.81,375.98 -2735.37,375.98 v3(-2735.37,543.48)
  Top Layer w100: Q2.5@-3031.5,478.15 Q2.6@-3031.5,528.15 Q2.7@-3031.5,578.15 Q2.8@-3031.5,628.15 ; U13.2@-2775.59,-533.46 U13.4@-2527.56,-533.46 -2163.35,-533.46 v3(-2023.43,-393.54)
  Bottom Layer w100: v3(-3027.43,436.46) -2987.43,476.46 -2802.4,476.46 v3(-2735.37,543.48) -2735.37,609.28 -2480.2,864.46 -2385.43,864.46 -1973.43,452.46 -1973.43,-196.04 -2023.43,-246.04 v3(-2023.43,-393.54)
12V0C: D2.2 J3.1 PTC1.2 Z1.1 | length 2146.7
  Top Layer w49.5: D2.2@1903.54,658.02 1944.07,658.02 1960.57,674.52 1960.57,706.46 1975.57,721.46 ; 2947.83,778.72 3027.57,858.46 3044.07,858.46 3064.96,879.34 Z1.1@3064.96,911.42
  Top Layer w70.87: 1975.57,721.46 PTC1.2@2104.33,721.46 2244.57,721.46
  Top Layer w100: 2244.57,721.46 2624.57,341.46 ; J3.1@2943.9,329.72 2636.31,329.72 2624.57,341.46 ; 2947.83,778.72 2947.83,738.19 2900.59,690.94 2666.56,690.94 2624.57,648.96 2624.57,341.46
12VSWITCHED: C3.1 C6.2 J5.1 J5.2 U2.1 | length 3033.8
  Top Layer w100: C3.1@478.34,-1002.95 373.34,-897.95 373.34,-725.27 430.07,-668.54 526.87,-668.54 583.43,-611.98 617.13,-645.67 ; 604.21,-645.36 651.88,-645.36 678.15,-619.09 678.15,-594.49 U2.1@732.28,-540.35 ; J5.2@2205.71,-1333.66 J5.1@2205.71,-1168.31
  Bottom Layer w100: C3.1@478.34,-1002.95 541.57,-1002.95 688.98,-855.54 2129.57,-855.54 2205.71,-931.68 J5.1@2205.71,-1168.31
BAT: Bat1.1 C28.2 C32.2 J5.3 R25.2 U11.10 | length 9272
  Top Layer w14.17: U11.10@-2604.33,-25.1 -2531.99,-25.1 -2531.41,-24.52 -2500.48,-56.83 -2428.43,-56.83 -2428.43,-57.36 -2373.03,-1.97
  Top Layer w100: R25.2@-2583.37,908.46 -2583.37,418.65 -2539.68,374.96 v3@-2159.43,374.96 ; -2340.43,-12.54 -2280.43,-72.54 v3(-2176.43,-72.54) ; v3(-2176.43,375.46) -2058.72,375.46 -1660.43,-22.83 -1660.43,-187.01 -1323.82,-523.62 -1323.82,-745.04 -833.32,-1235.54 -158.18,-1235.54 -30.51,-1107.88 104.72,-1107.88 203.74,-1008.86 203.74,-960.71 ; C28.2@273.62,-372.05 273.62,-439.66 203.74,-509.54 C32.2@203.74,-575.79 203.74,-960.71 ; v3(401.57,-1850.39) 401.57,-1157.48 401.04,-1158.01 203.74,-960.71
  Bottom Layer w100: v3(-2176.43,-72.54) v3(-2176.43,375.46) ; v3(401.57,-1850.39) 1786.42,-1850.39 1914.37,-1978.35 2213.58,-1978.35 2311.57,-1880.35 2311.57,-1604.88 J5.3@2205.71,-1499.02
BAT2: Bat1.2 Bat2.1 | length 983.1
  Bottom Layer w100: Bat2.1@-1990.16,1887.76 -1813.79,1887.76 -1722.79,1978.76 -1627.52,1978.76 -1536.52,1887.76 -1103.31,1887.76 -1100.35,1884.8 Bat1.2@-1083.66,1884.8
BAT3: Bat2.2 Bat3.1 | length 731.9
  Top Layer w100: Bat3.1@-2321.81,-1576.77 -2321.81,-1547.2 -2145.67,-1371.06 -2145.67,-1137.76 Bat2.2@-1990.16,-982.24
CAN1H: J1.2 J2.2 U1.7 | length 2697.9
  Top Layer w15: J1.2@-383.86,1683.07 -331.43,1735.5 ; J2.2@-372.05,900.59 -432.43,960.97 -432.43,1136.46 -621.43,1325.46 -621.43,1629.75 -457.66,1793.52 -457.66,1938.22 -443.43,1952.46 -352.43,1952.46 -331.43,1931.46 -331.43,1735.5 ; U1.7@27.56,1427.56 -18.43,1427.56 -33.43,1442.56 -33.43,1747.46 -145.43,1859.46 -145.43,1994.46 -153.93,2002.96 -255.93,2002.96 -270.43,1988.46 -270.43,1796.5 -331.43,1735.5
CAN1L: J1.3 J2.3 U1.6 | length 1000.9
  Top Layer w15: J1.3@-218.51,1899.6 -55.93,1737.02 -55.93,1390.06 -43.43,1377.56 ; J2.3@-206.69,1117.12 -101.93,1221.89 -101.93,1331.56 -55.93,1377.56 -43.43,1377.56 ; U1.6@27.56,1377.56 -43.43,1377.56

## Text inside footprints (layer, text, board x,y; h text height)
BRD4: Top Overlay "3.3V" at 391.7,644.28 h30 r90; Top Overlay "EN" at 291.7,649.28 h30 r90; Top Overlay "VBAT" at 191.7,644.28 h30 r90; Top Overlay "FIX" at 91.7,644.28 h30 r90; Top Overlay "TX" at -8.3,644.28 h30 r90; Top Overlay "RX" at -108.3,649.28 h30 r90; Top Overlay "GND" at -208.3,644.28 h30 r90; Top Overlay "Vin" at -308.3,644.28 h30 r90; Top Overlay "PPS" at -408.3,644.28 h30 r90; Bottom Overlay "PPS" at -408.3,719.25 h30 r90; Bottom Overlay "RX" at -108.3,689.26 h30 r90; Bottom Overlay "TX" at -8.3,689.26 h30 r90; Bottom Overlay "EN" at 291.7,689.26 h30 r90; Bottom Overlay "3.3V" at 391.7,744.24 h30 r90; Bottom Overlay "Vin" at -308.3,714.25 h30 r90; Bottom Overlay "GND" at -208.3,719.25 h30 r90; Bottom Overlay "FIX" at 91.7,714.25 h30 r90; Bottom Overlay "VBAT" at 191.7,749.24 h30 r90
C3: Top Overlay "+" at 498.35,-1142.95 h40 r90; Top Overlay "-" at 498.35,-687.95 h40 r90; Bottom Overlay "-" at 498.35,-762.95 h40 r90; Bottom Overlay "+" at 498.35,-1082.95 h40 r90
C4: Top Overlay "+" at 74.63,-1142.95 h40 r90; Top Overlay "-" at 74.63,-687.95 h40 r90; Bottom Overlay "-" at 74.63,-762.95 h40 r90; Bottom Overlay "+" at 74.63,-1082.95 h40 r90
C7: Top Overlay "-" at -349.09,-687.95 h40 r90; Top Overlay "+" at -349.09,-1142.95 h40 r90; Bottom Overlay "+" at -349.09,-1082.95 h40 r90; Bottom Overlay "-" at -349.09,-762.95 h40 r90
C16: Top Overlay "-" at -2631.57,-708.62 h40 r90; Top Overlay "+" at -2631.57,-1163.62 h40 r90; Bottom Overlay "+" at -2631.57,-1103.62 h40 r90; Bottom Overlay "-" at -2631.57,-783.62 h40 r90
J1: Top Overlay "2" at -411.18,1519.61 h60; Top Overlay "4" at -411.18,2009.61 h60; Top Overlay "3" at -221.18,2009.61 h60; Top Overlay "1" at -221.18,1519.61 h60
J2: Top Overlay "2" at -399.37,737.13 h60; Top Overlay "4" at -399.37,1227.13 h60; Top Overlay "3" at -209.37,1227.13 h60; Top Overlay "1" at -209.37,737.13 h60
J3: Top Overlay "+12V" at 2848.43,175.2 h60; Top Overlay "SOL" at 2876.97,624.02 h60
J5: Top Overlay "SW" at 1977.36,-1202.76 h60; Top Overlay "GND" at 2330.71,-1862.2 h60
U2: Top Overlay "Vin" at 843.28,-633.35 h40 r90; Top Overlay "TAB" at 645.28,-497.35 h40 r90; Top Overlay "5V" at 844.28,-351.35 h40 r90; Top Overlay "GND" at 867.28,-487.35 h40 r90